# EAGLE board RGB LED Showcase Light (EAGLE 7.6.0)
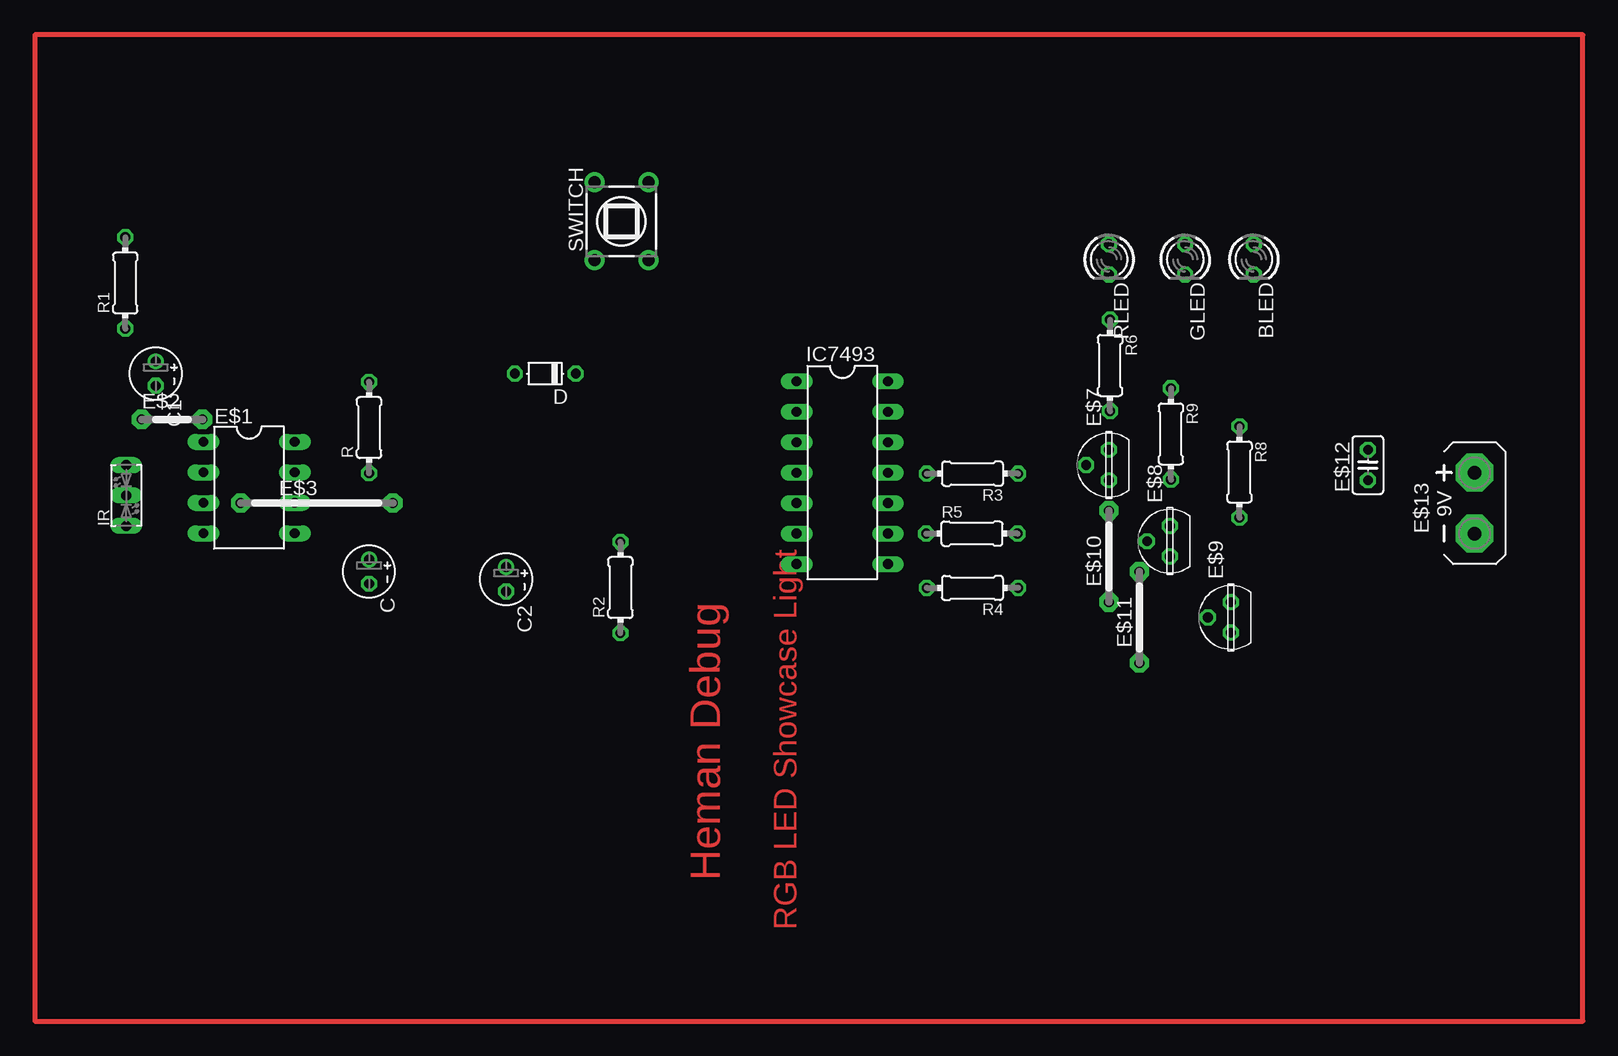
[diagram p0: board, top side]
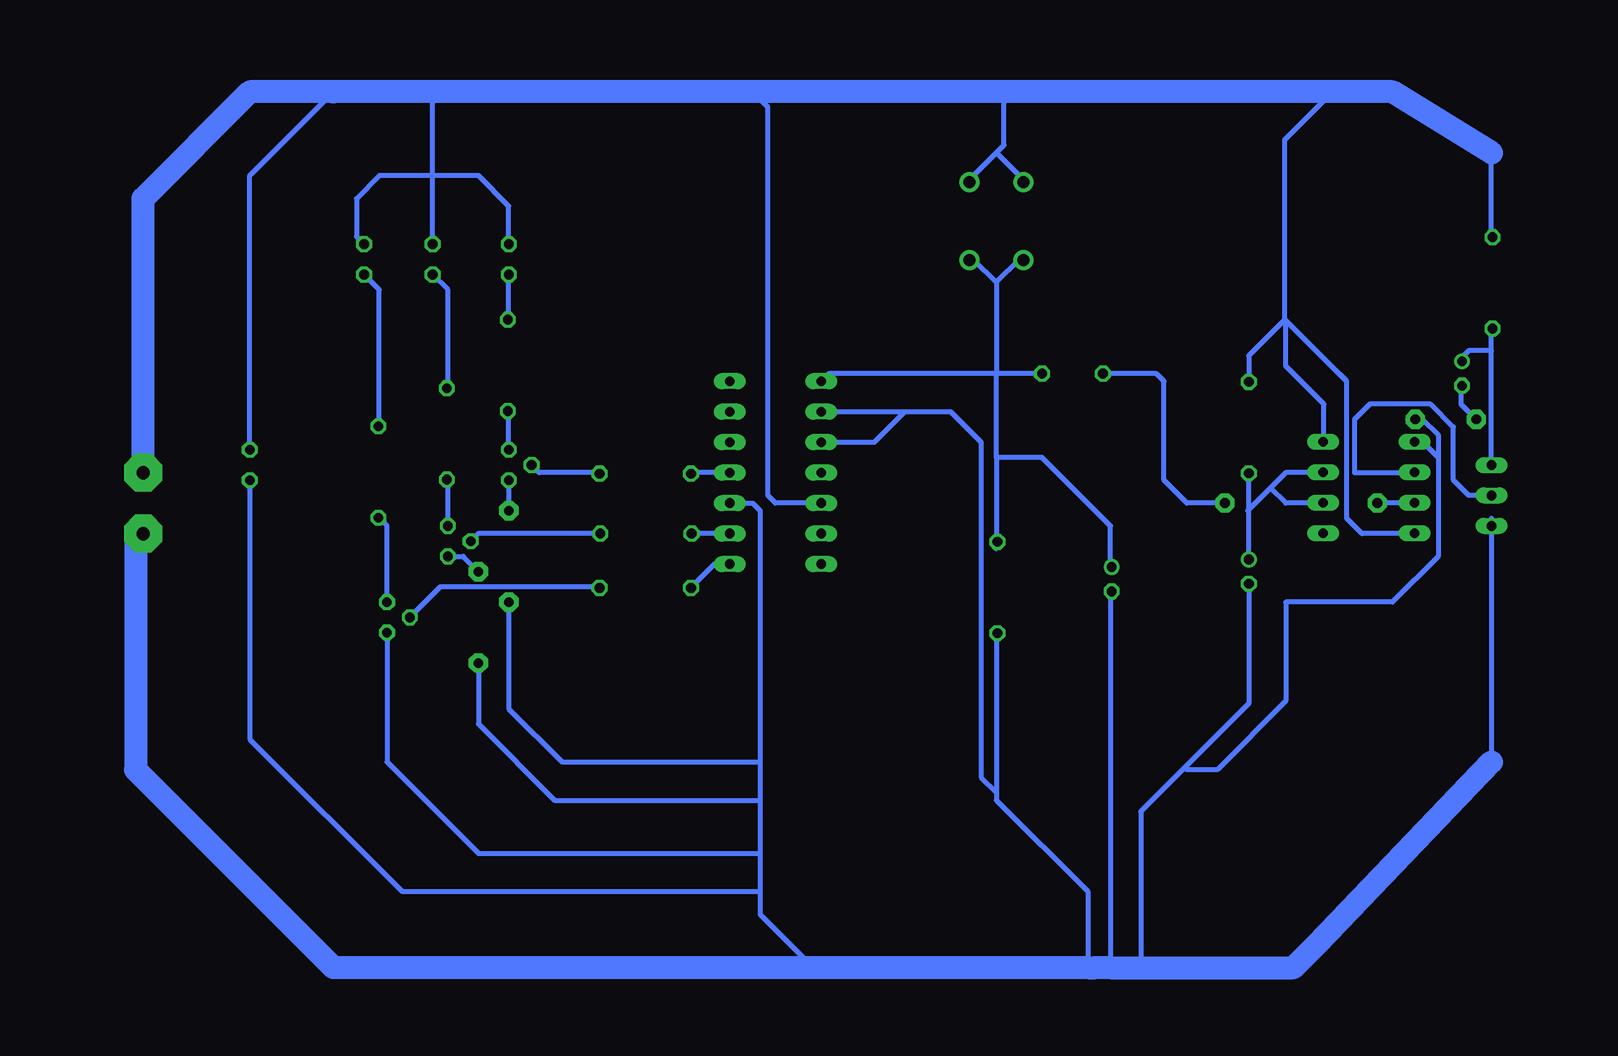
[diagram p1: board, bottom side, seen from below]

No outline drawn. Coordinates in mm, seen from the top.
Copper layers (1*16): Top 0.035mm / dielectric 1.5mm / Bottom 0.035mm
Design rules "default": minimum track width 10mil, minimum drill 24mil, track to track 8mil, track to pad 8mil, pad to pad 8mil, via to via 8mil, smd to smd 8mil, copper to edge 40mil, drill to drill 8mil, minimum pad ring 10mil, minimum via ring 8mil, stop-mask expansion 4mil, vias tented up to drill 0mil, thermal gap 10mil

## Footprints (pad centres in the part's own frame; a part is rotated, then mirrored left to right if it is on the bottom)
LED3MM = drill 0.813 octagon: A -1.27,0; K 1.27,0
E2-4 = drill 0.813 pad 1.27: + -1.016,0 | drill 0.813 pad 1.27 octagon: - 1.016,0
D-5 = drill 0.813 octagon: A 2.54,0; C -2.54,0
DIL08 = drill 0.813 long: 1 -3.81,-3.81; 2 -1.27,-3.81; 3 1.27,-3.81; 4 3.81,-3.81; 5 3.81,3.81; 6 1.27,3.81; 7 -1.27,3.81; 8 -3.81,3.81
05 = drill 0.813 pad 1.6 octagon: 1 -2.54,0; 2 2.54,0
12 = drill 0.813 pad 1.6 octagon: 1 -6.35,0; 2 6.35,0
TO237 = drill 0.813 octagon: 1 1.27,0; 2 0,1.905; 3 -1.27,0
07 = drill 0.813 pad 1.6 octagon: 1 -3.81,0; 2 3.81,0
C025-025X050 = drill 0.813 octagon: 1 -1.27,0; 2 1.27,0
AB9V = drill 1.118 pad 3.15 octagon: + 0,2.54; - 0,-2.54
DIL14 = drill 0.813 long: 1 -7.62,-3.81; 2 -5.08,-3.81; 3 -2.54,-3.81; 4 0,-3.81; 5 2.54,-3.81; 6 5.08,-3.81; 7 7.62,-3.81; 8 7.62,3.81; 9 5.08,3.81; 10 2.54,3.81; 11 0,3.81; 12 -2.54,3.81; 13 -5.08,3.81; 14 -7.62,3.81
DUOLED2X5 = drill 0.813 long: AG -2.54,0; AR 2.54,0; K 0,0
0204/7 = drill 0.813 octagon: 1 -3.81,0; 2 3.81,0
TL1105SP = drill 1 pad 1.676: 1 -2.25,3.25; 2 2.25,3.25; 3 -2.25,-3.25; 4 2.25,-3.25

## Placement (x,y rotation side)
BLED  [LED3MM]  118.75,73.03 270 top
C  1u  [E2-4]  45,47 270 top
C1  1u  [E2-4]  27.22,63.51 270 top
C2  1u  [E2-4]  56.43,46.37 270 top
D  [D-5]  59.69,63.5 180 top
E$1  [DIL08]  35,54 270 top
E$2  [05]  28.57,59.69 0 top
E$3  [12]  40.64,52.7 0 top
E$7  [TO237]  106.68,55.88 90 top
E$8  [TO237]  111.76,49.53 90 top
E$9  [TO237]  116.84,43.18 90 top
E$10  [07]  106.68,48.26 90 top
E$11  [07]  109.22,43.18 90 top
E$12  [C025-025X050]  128.27,55.88 90 top
E$13  [AB9V]  137.16,52.7 0 top
GLED  [LED3MM]  113.03,73.03 270 top
IC7493  [DIL14]  84.45,55.24 270 top
IR  [DUOLED2X5]  24.77,53.34 90 top
R  1m  [0204/7]  45,59 90 top
R1  100E  [0204/7]  24.68,71.06 90 top
R2  560E  [0204/7]  65.95,45.66 90 top
R3  270E  [0204/7]  95.31,55.16 180 top
R4  270E  [0204/7]  95.31,45.63 180 top
R5  270E  [0204/7]  95.25,50.16 0 top
R6  470E  [0204/7]  106.77,64.19 270 top
R8  470E  [0204/7]  117.56,55.3 270 top
R9  470E  [0204/7]  111.84,58.48 270 top
RLED  [LED3MM]  106.68,73.03 270 top
SWITCH  [TL1105SP]  66.04,76.2 0 top

## Library data of the parts
BLED GLED IR RLED = led
C C1 C2 E$12 R R1-R6 R8 R9 = resistor
D = diode
E$1 IC7493 = ic-package
E$2 E$3 E$10 E$11 = jumper
E$7-E$9 = transistor-fet
E$13 = battery
SWITCH = switch

## Nets
S$8: D.A E$3.2
S$9: IR.K
S$10: E$2.1
S$11: IR.AR
S$12: BLED.A E$12.2 E$13.+ GLED.A RLED.A
S$14: E$3.1
S$15: IC7493.5
S$16: E$7.1
S$17: E$9.3 E$10.1 E$12.1 IC7493.2 IC7493.3 IC7493.10
S$20: D.C IC7493.1
S$21: IC7493.11
S$22: IC7493.9 R5.1
S$23: IC7493.8
S$24: E$7.2
S$25: E$8.2 R5.2
S$26: E$9.2
S$27: E$8.1
S$28: E$7.3 E$10.2
S$29: E$8.3 E$11.2
S$30: E$9.1
S$32: RLED.K
S$33: GLED.K
S$34: BLED.K

## Tracks (layer width: path | path; a pad name or v marks a point on that pad's centre or on a via)
S$1
  Top 0.406: 17.14,9.53 146.19,9.53 146.19,91.75 17.14,91.75 17.14,9.53
S$2
  Bottom 0.406: 45,48 45,55
S$3
  Bottom 0.406: 38.73,57.78 38.73,60.96 41.91,64.14 41.91,67.94
S$4
  Bottom 0.406: 45,46 45,36 54,27 54,14
S$5
  Bottom 0.406: 38.73,55.24 41.91,55.24 43.18,53.98 | 43.18,53.98 45.09,52.07 | 38.73,52.7 41.91,52.7 43.18,53.98
S$6
  Bottom 0.406: 38,87 42,83 42,68 | 37,63 42,68 | 45,63 45,65 42,68
S$7
  Bottom 0.406: 31.11,50.16 35.56,50.16 36.83,51.44 36.83,62.87 38.1,64.14
S$8
  Bottom 0.406: E$3.2 50.16,52.7 52.07,54.61 52.07,62.87 52.7,63.5 D.A
S$9
  Bottom 0.406: IR.K 26.67,53.34 27.94,54.61 27.94,59.05 29.84,60.96 34.92,60.96 36.2,59.69 36.2,55.24 31.11,55.24
S$10
  Bottom 0.406: 27.3,62.23 27.3,60.96 E$2.1
S$11
  Bottom 0.406: IR.AR 24.77,65.41 | 24.77,65.41 24.77,67.31 | 24.77,65.41 26.67,65.41 27.3,64.77
S$12
  Bottom 0.406: 24.77,74.93 24.77,81.92 | 68.58,80.01 67.94,80.01 66.04,81.92 | 66.04,81.92 65.41,82.55 65.41,87 | 64.14,80.01 66.04,81.92 | RLED.A 106.68,77.47 109.22,80.01 113.03,80.01 | 113.03,80.01 117.47,80.01 119.38,78.11 119.38,74.93 BLED.A | GLED.A 113.03,80.01 | 113.03,80.01 113.03,87 | E$12.2 128.27,80.01 121.28,87
  Bottom 1.93: 24.77,81.92 33.02,87 65.41,87 113.03,87 121.28,87 128.27,87 137.16,78.11 E$13.+
S$13
  Bottom 0.406: 31.75,59.69 30.48,59.69 29.21,58.42 29.21,56.52 | 31.11,57.78 30.48,57.78 29.21,56.52 | 29.21,56.52 29.21,48.26 33.02,44.45 41.91,44.45 41.91,36.2 47.62,30.48 50.16,30.48
S$14
  Bottom 0.406: 31.11,52.7 E$3.1
S$15
  Bottom 0.406: IC7493.5 84.45,52.7 85.09,53.34 85.09,85.72 87,87.63
S$16
  Bottom 0.406: E$7.1 106.68,60.33
S$17
  Bottom 0.406: 56.52,45.09 56.52,13.97 | IC7493.3 76.2,57.78 73.66,60.33 | IC7493.2 73.66,60.33 | 73.66,60.33 69.85,60.33 67.31,57.78 67.31,29.84 66.04,28.57 | 66.04,41.91 66.04,28.57 | 66.04,28.57 66.04,27.94 58.42,20.32 58.42,14.61 | 57.78,13.97 58.42,14.61 | 58.42,14.61 58.42,13.97 | E$12.1 128.27,33.02 115.57,20.32 85.72,20.32 | 109.22,40.01 109.22,34.29 102.87,27.94 85.72,27.94 | E$10.1 106.68,35.56 102.23,31.11 85.72,31.11 | E$9.3 116.84,31.11 109.22,23.5 85.72,23.5 | IC7493.10 86.36,52.7 85.72,52.07 85.72,31.11 | 85.72,31.11 85.72,27.94 | 85.72,27.94 85.72,23.5 | 85.72,23.5 85.72,20.32 | 85.72,20.32 85.72,18.41 81.28,13.97 | 24.77,51.44 24.77,31.11
  Bottom 1.93: 137.79,50.16 137.79,30.48 121.28,13.97 81.28,13.97 58.42,13.97 57.78,13.97 56.52,13.97 41.27,13.97 39.37,15.88 24.77,31.11
S$20
  Bottom 0.406: 64.14,73.03 66.04,71.12 | 56.52,46.99 56.52,50.8 62.23,56.52 66.04,56.52 | 66.04,56.52 66.04,48.9 | D.C 66.04,63.5 | 66.04,63.5 80.01,63.5 IC7493.1 | 66.04,56.52 66.04,62.87 66.04,63.5 | 66.04,71.12 66.04,63.5 | 68.58,73.03 67.94,73.03 66.04,71.12
S$21
  Bottom 0.406: IC7493.11 91.44,55.24
S$22
  Bottom 0.406: IC7493.9 R5.1
S$23
  Bottom 0.406: IC7493.8 89.53,47.62 91.44,45.72
S$24
  Bottom 0.406: 99.06,55.24 104.14,55.24 E$7.2
S$25
  Bottom 0.406: R5.2 109.22,50.16 E$8.2
S$26
  Bottom 0.406: 99.06,45.72 112.39,45.72 E$9.2
S$27
  Bottom 0.406: E$8.1 111.76,54.61
S$28
  Bottom 0.406: E$7.3 E$10.2
S$29
  Bottom 0.406: E$8.3 110.49,48.26 E$11.2
S$30
  Bottom 0.406: E$9.1 116.84,50.8 117.47,51.44
S$32
  Bottom 0.406: 106.68,67.94 RLED.K
S$33
  Bottom 0.406: 111.76,62.23 111.76,70.48 GLED.K
S$34
  Bottom 0.406: 117.47,59.05 117.47,70.48 BLED.K

## Text on the board
Top: Heman Debug | RGB LED Showcase Light